# Altium PCB Devre_2_Proje.PcbDoc
Units mm, origin at the board's own origin, x right, y up, seen from the top; angles counter-clockwise.
Board outline 100 x 100 mm, 2 copper layers (Top Layer, Bottom Layer); 11 components, 4 nets, 25 pads, 6 vias.
Unrouted connection lines stored in the file: 7.
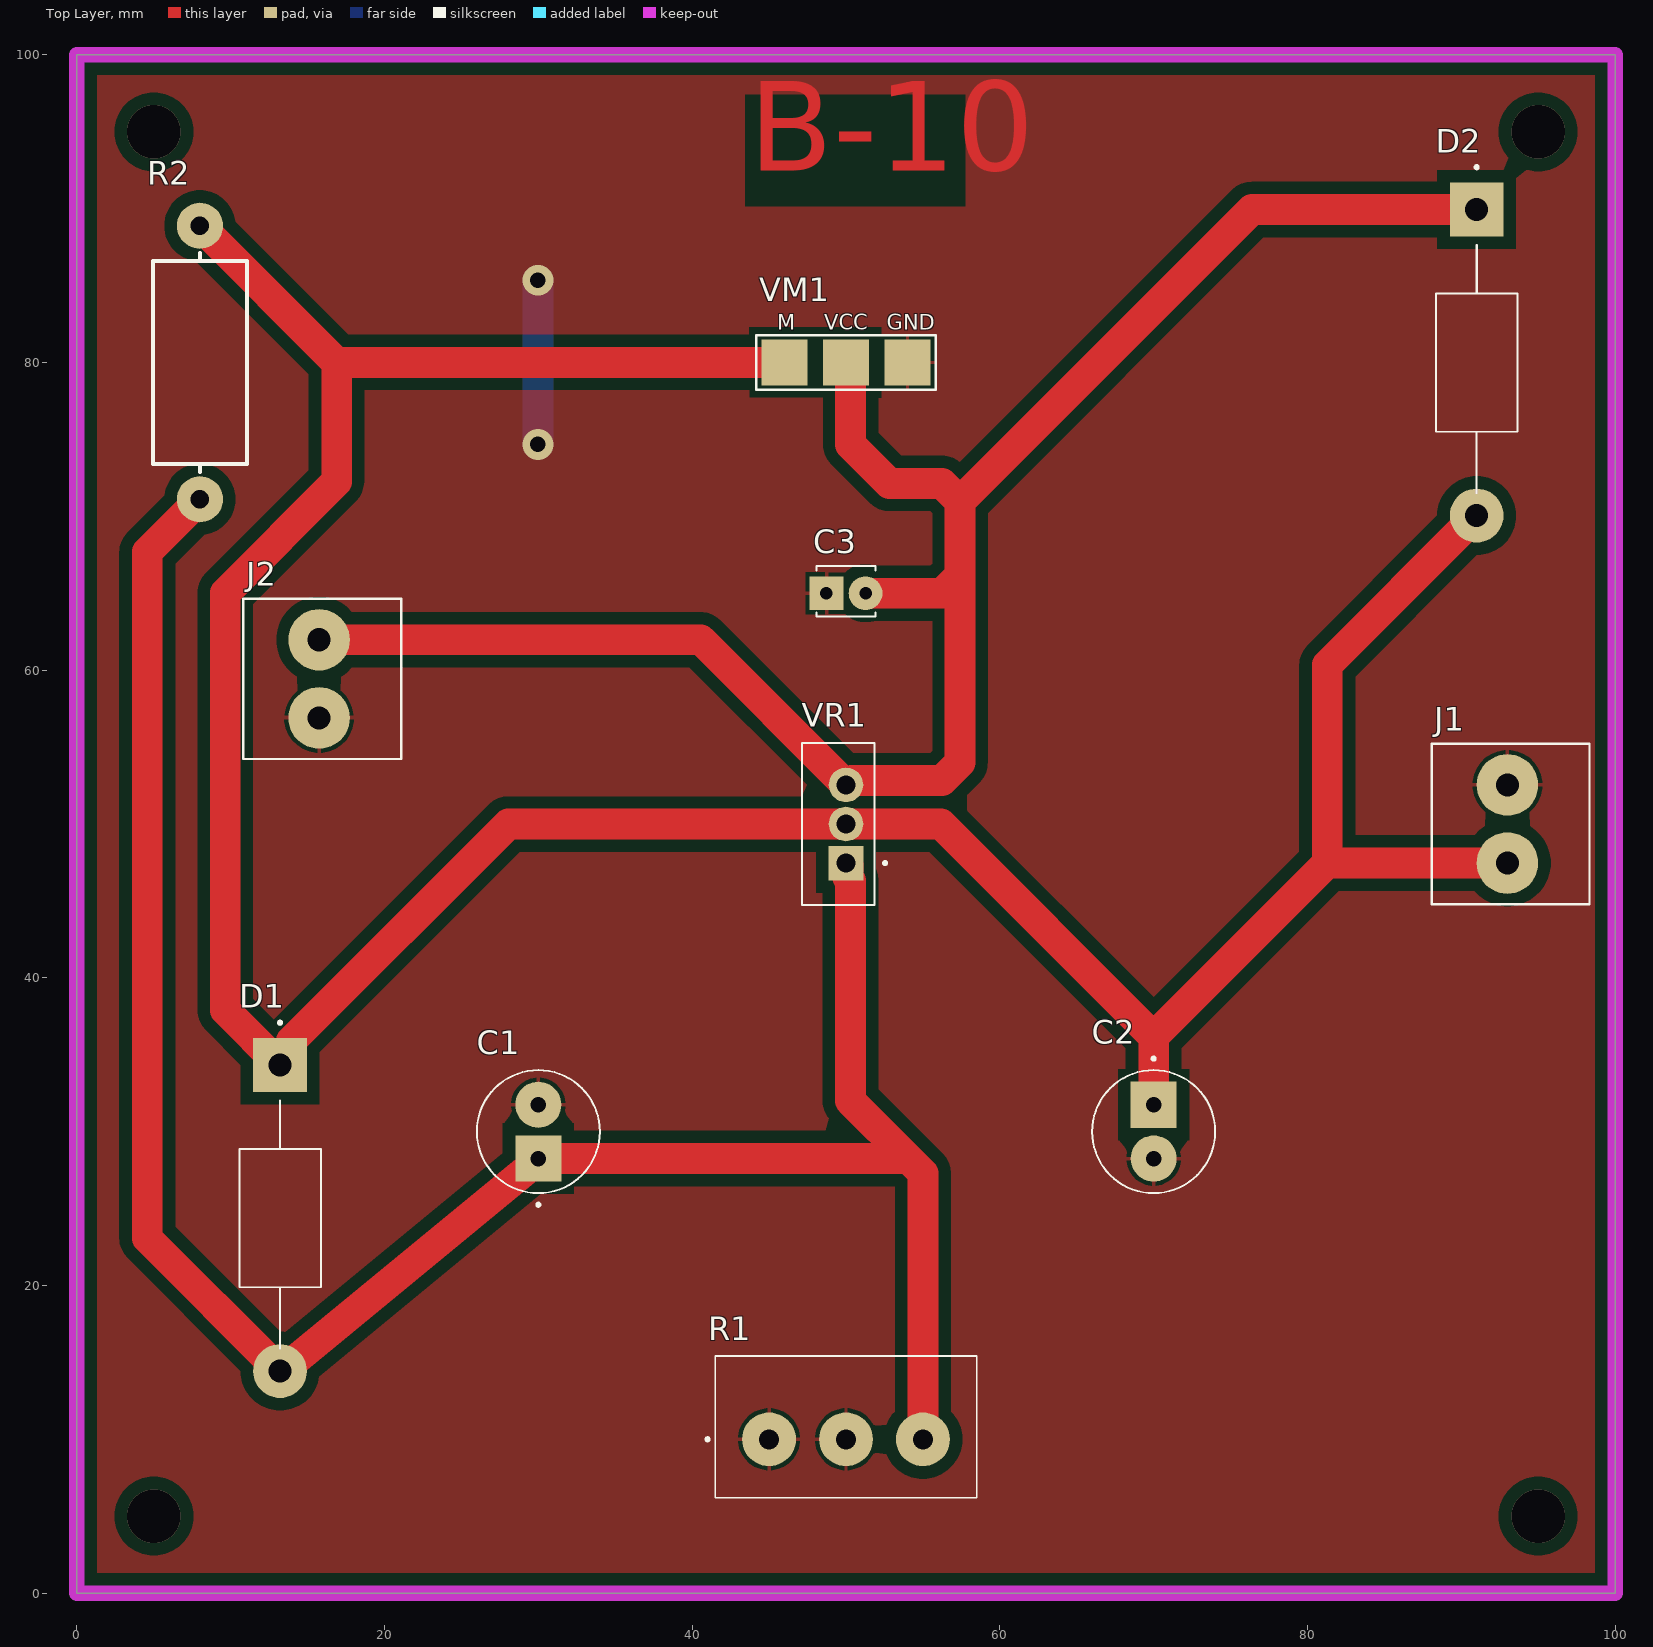
[diagram p0: Top Layer view]
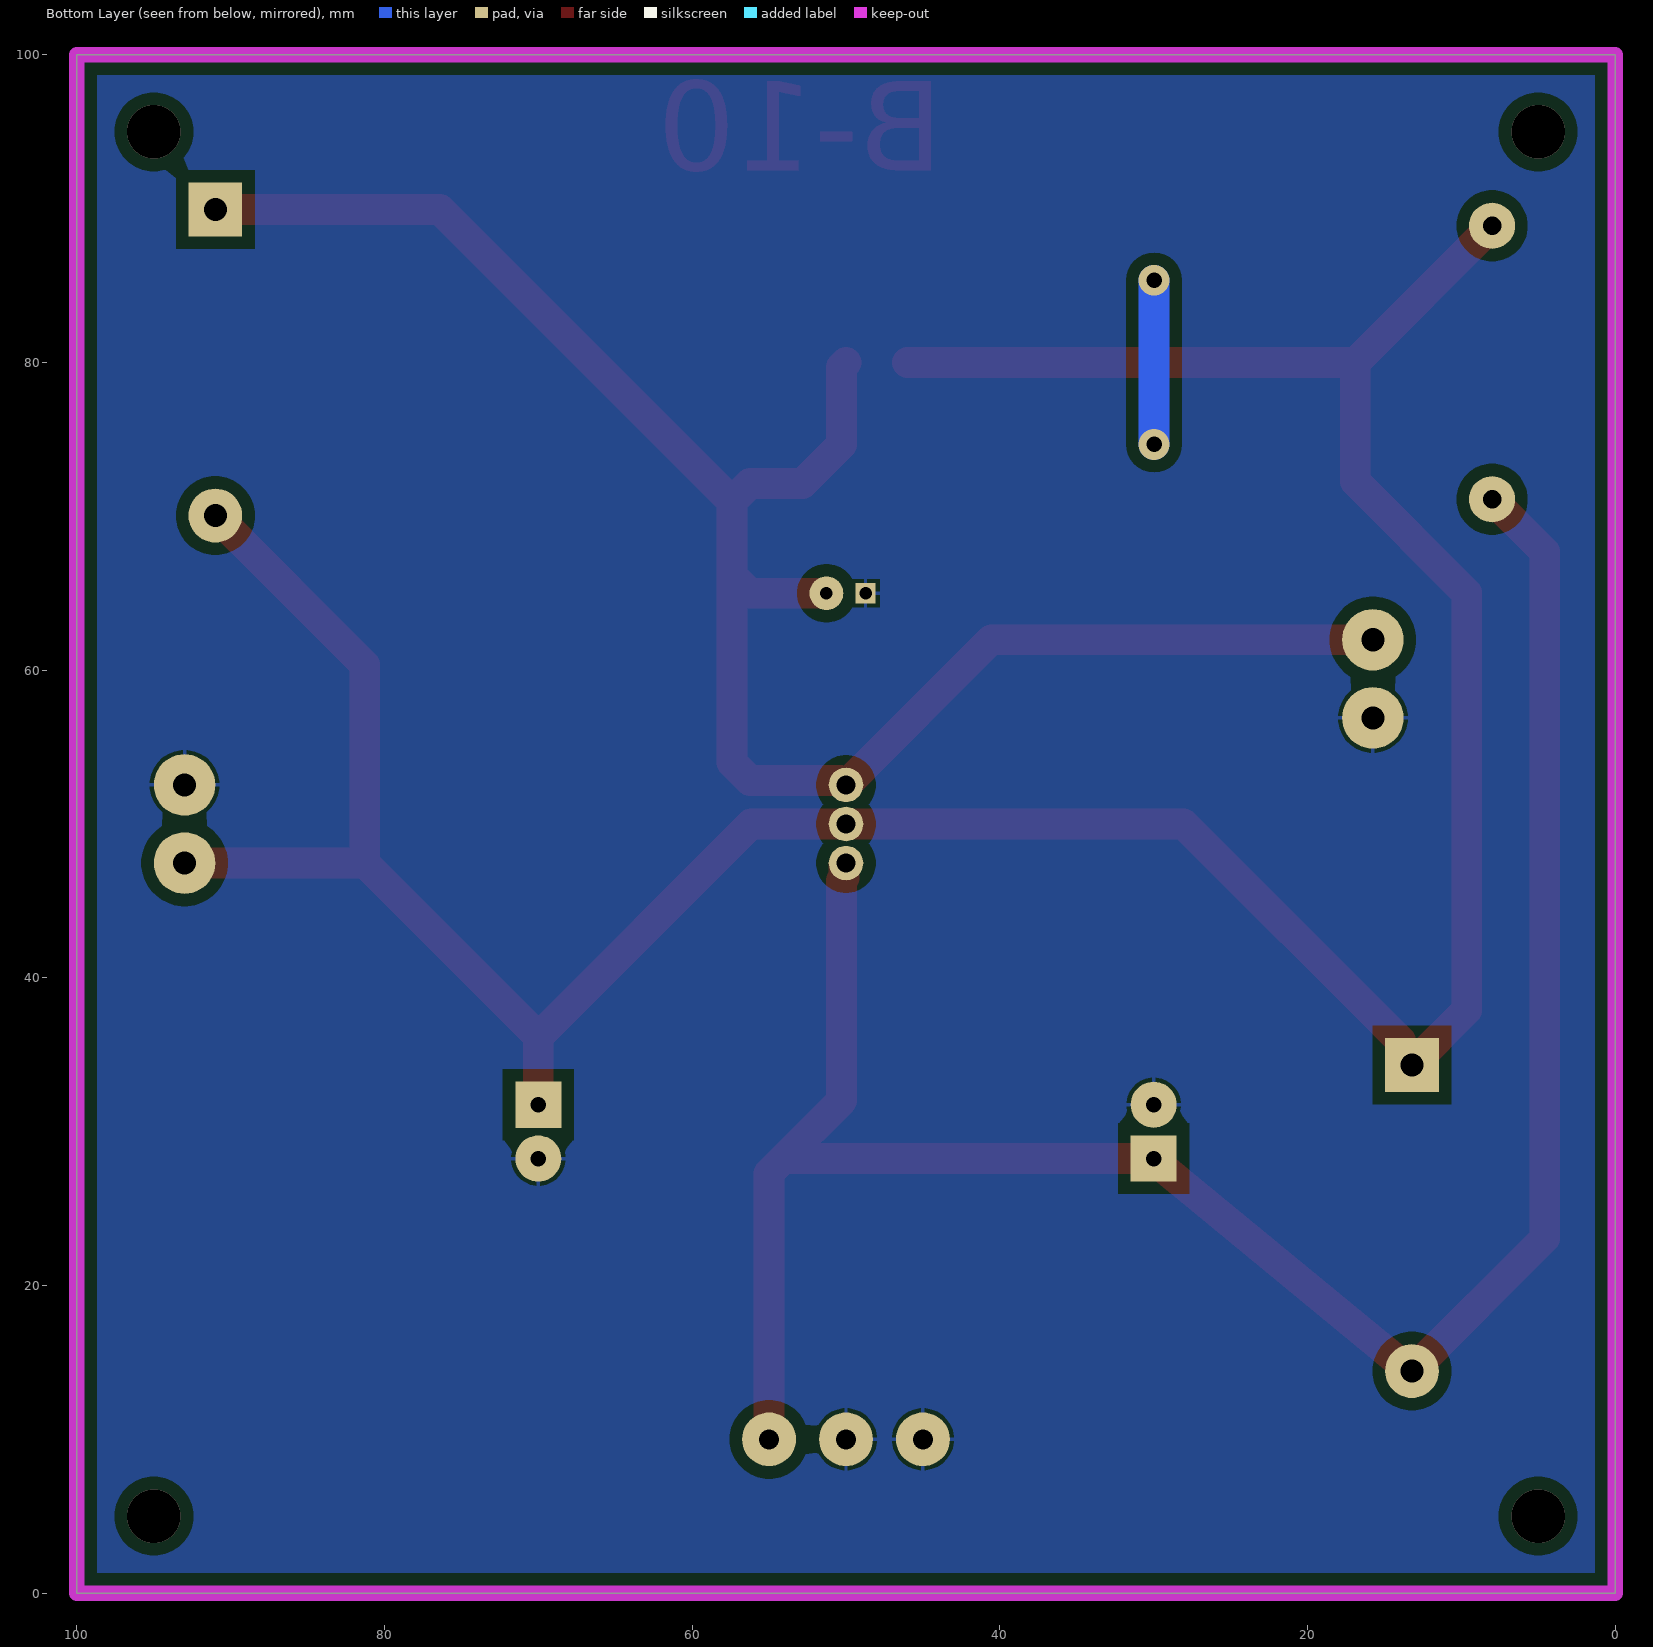
[diagram p1: Bottom Layer view, seen from below]
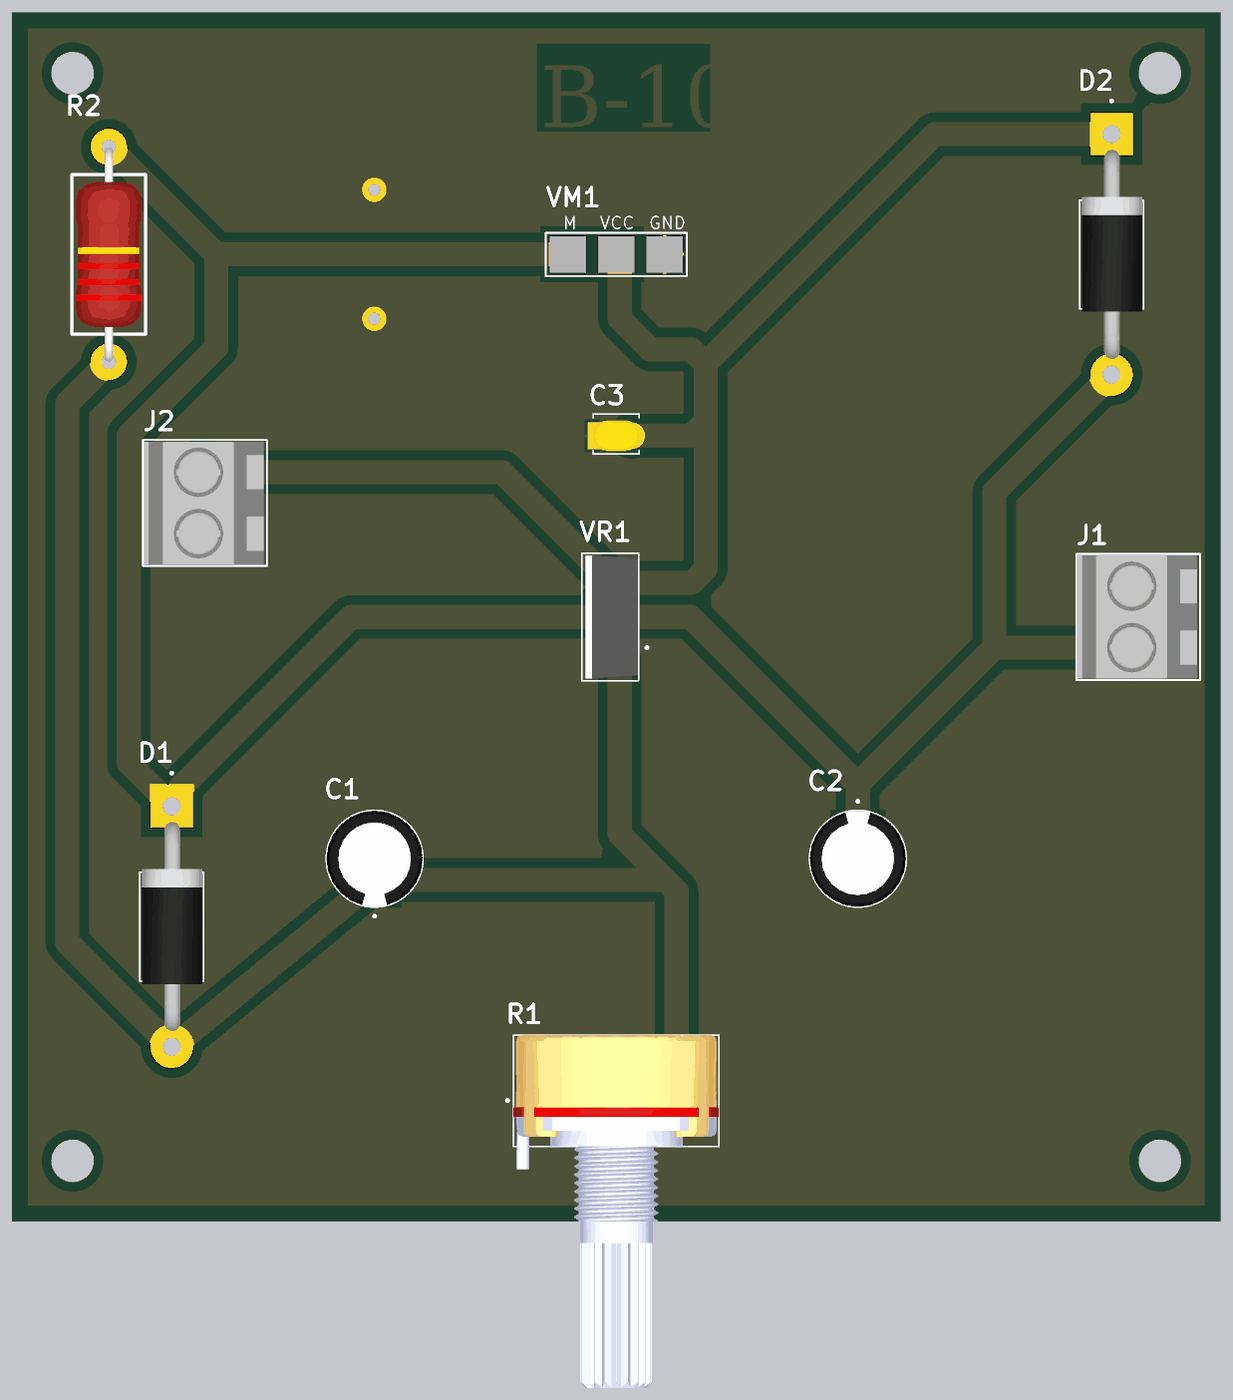
[diagram p2: 3D render of the assembled board from above, using the file's embedded part models]

## Layer stack, top to bottom
Top Solder: solder mask 0.0102, Solder Resist, Dk 3.5
Top Layer: signal copper 0.0356
Dielectric 1: dielectric 0.32, FR-4, Dk 4.8
Bottom Layer: signal copper 0.0356
Bottom Solder: solder mask 0.0102, Solder Resist, Dk 3.5

## Board outline
0,0 0,100 100,100 100,0

## Design rules (kind name [scope] priority, off if disabled: settings)
Clearance [All] p1: gap=0.254 ignorepadtopadclearanceinfootprint=TRUE except(0.8: Arc-Fill Arc-Poly Arc-Region Track-Fill Track-Poly Track-Region SMDPad-Fill SMDPad-Poly SMDPad-Region THPad-Fill THPad-Poly THPad-Region Via-Fill Via-Poly Via-Region Fill-Fill Fill-Poly Fill-Region Poly-Poly Poly-Region Region-Region)
PolygonConnect [All] p1: connectstyle=Relief reliefconductorwidth=0.254 reliefentries=4 polygonreliefangle="90 Angle" airgapwidth=0.254
RoutingVias [All] p1: holewidth=0.711 width=1.27 viastyle="Through Hole" minholewidth=0.711 minwidth=1.27 maxholewidth=0.711 maxwidth=1.27
SolderMaskExpansion [All] p1: expansion=0 istentingtop=FALSE
SupplyNets "Schematic Supply Nets" [InNet('GND')] p1: voltage=0.000
Width [All] p1: maxlimit=2.5 minlimit=0.8 preferedwidth=1.5 minimp=50.000000 maximp=50.000000 favimp=50.000000
30 further rules are at their usual default settings.

## Components (designator, comment, footprint, x,y, rotation, side; value= is the part's Value field where it differs from the comment)
C1 "10uF" CAP-ELEC 30,30 r90 top
C2 "22uF" CAP-ELEC 70,30 r270 top
C3 "100nF" CAP-CER-100nF 50,65 r0 top
D1 "1N5408G" DIODE_1N5408 13.208,24.384 r270 top
D2 "1N5408G" DIODE_1N5408 91,80 r270 top
J1 "TERM BLK 1x2P 5.08mm" Term_Block_5.08mm-1x2P 93,50 r90 top value="Term Block"
J2 "TERM BLK 1x2P 5.08mm" Term_Block_5.08mm-1x2P 15.748,59.436 r90 top value="Term Block"
R1 "POT" POT 50,10 r0 top
R2 "220R" RES-AXIAL-0.7 8,80 r270 top
VM1 "Voltmetre" Voltmetre 50,80 r0 top
VR1 "LM317T" LM317T 50,50 r90 top

## Footprints (in the part's own frame and the unit in brackets; to place one, negate y for a bottom-side part, rotate by r counter-clockwise, add the part's x,y. Pads: shape width x height; smd on the part's side, far side on the other; paste and mask are expansions set on the pad)
CAP-CER-100nF [mm]
  rect 2.2x2.2 / inner round 1.318 / far side rect 1.318x1.318 hole 0.81: 1(-1.27,0)
  round 2.2 hole 0.81: 2(1.27,0)
  silkscreen extent -1.91,-1.52 1.91,1.78, body extent -1.91,-1.27 1.91,1.27, height 4.66
CAP-ELEC [mm]
  rect 3x3 / inner round 3 / far side rect 3x3 hole 1: 1(-1.75,0)
  round 3 hole 1: 2(1.75,0)
  silkscreen extent -4.85,-4 4,4, body extent -4,-3.99 3.99,3.99, height 11.5
DIODE_1N5408 [mm]
  round 3.5 hole 1.5 mask+0.102: A(9.95,0)
  rect 3.5x3.5 / inner round 3.5 / far side rect 3.5x3.5 hole 1.5 mask+0.102: C(-9.95,0)
  silkscreen extent -12.8,-2.65 8.47,2.65, body extent -8.66,-2.46 8.66,2.54, height 6
LM317T [mm]
  rect 2.25x2.25 / inner round 2.25 / far side round 2.25 hole 1.24: 1(-2.54,0)
  round 2.25 hole 1.24: 2(0,0) 3(2.54,0)
  silkscreen extent -5.27,-2.64 5.27,2.86, body extent -5.08,-1.81 5.08,2.54, height 20.4
POT [mm]
  round 3.5 hole 1.3 mask+0.102: 1(-5,0) 2(0,0) 3(5,0)
  silkscreen extent -9.1,-3.8 8.5,5.4, body extent -8.5,-23.8 8.49,5.4, height 21
RES-AXIAL-0.7 [mm]
  round 3 hole 1.2 mask+0.08: 1(-8.89,0) 2(8.89,0)
  silkscreen extent -7.11,-3.05 7.11,3.05, body extent -8.85,-2.75 8.85,2.75, height 5.25
Term_Block_5.08mm-1x2P [mm]
  round 4 hole 1.5: 1(-2.54,0) 2(2.54,0)
  silkscreen extent -5.21,-5.33 5.21,4.93, body extent -5.08,-5.08 5.08,4.83, height 14.48
Voltmetre [mm]
  rect 3x3 smd mask+0.08: 1(-4,0) 2(0,0) 3(4,0)
  silkscreen extent -5.84,-1.78 5.84,1.78

## Part data
C1: library part "CAP ELEC 10uF", "CAP-ELEC 10 uF"
C2: library part "CAP ELEC 22uF", "CAP-ELEC 22 uF"
C3: library part "CAP CER", "0.1uF (100nF)"
D1 D2: "3A, 1000V, Standard Rectifier", Package="DO-201AD Taiwan Semiconductor", Check_prices=https://www.snapeda.com/parts/1N5408G/taiwan/view-part/?ref=eda, MF="Taiwan Semiconductor", MP=1N5408G, SnapEDA_Link=https://www.snapeda.com/parts/1N5408G/taiwan/view-part/?ref=snap
J1 J2: "17.5A 1x2P 2P 400V 5.08mm Board Side/Plug Green 2 1 Through Hole,P=5.08mm Headers, Plugs and Sockets RoHS", Current Rating=17.5A, Package="Through Hole,P=5.08mm", Voltage Rating (Max)=400V, MF="Phoenix Contact", MP="MKDS 1,5/ 2-5,08"
R1: "16mm Rotary Potentiometers", Package=Package, Check_prices=https://www.snapeda.com/parts/WH148-1A-2-18T-L20/Kls+electronics/view-part/?ref=eda, MF="Kls electronics", MP=WH148-1A-2-18T-L20, SnapEDA_Link=https://www.snapeda.com/parts/WH148-1A-2-18T-L20/Kls+electronics/view-part/?ref=snap
R2: library part "RES 220R", "RES 220R 2W / AXIAL-0.7"
VM1: "Voltmetre 3 kablolu 0-100V"
VR1: "Linear Voltage Regulator IC Positive Adjustable 1 Output 1.5A TO-220AB", Package="TO-220-3 ON", Check_prices=https://www.snapeda.com/parts/LM317T/Onsemi/view-part/?ref=eda, MF=onsemi, MP=LM317T, SnapEDA_Link=https://www.snapeda.com/parts/LM317T/Onsemi/view-part/?ref=snap

## Via types
v1: diameter 3.5, hole 3.5, Top Layer to Bottom Layer, 4 vias
v2: diameter 2, hole 1, Top Layer to Bottom Layer, 2 vias

## Nets (pads, with @x,y where several pads share a name; then routed paths per layer and width w, separated by ;. In a path a pad name is that pad's centre, name@x,y a point inside that pad or via, vN(x,y) a via of type N, cw(c..) or ccw(c..) an arc to the next point about the centre after c; other vN are vias at no path point)
GND: C1.2 C2.2 C3.1 J1.2 J2.1 R1.1 R1.2 VM1.3 | length 10.7
  Bottom Layer w2: v2(29.972,74.676) v2(29.972,85.344)
NetC1_1: C1.1 D1.A R1.3 R2.2 VR1.1 | length 147
  Top Layer w2: R2.2 4.572,67.682 4.572,23.07 D1.A ; D1.A@13.261,14.381 29.5,27.75 C1.1 54.046,28.25 ; VR1.1 50.125,47.335 50.125,46.499 50.292,46.332 50.292,32.004 54.046,28.25 ; R1.3 55,27.296 54.046,28.25
NetC2_1: C2.1 D1.C D2.A J1.1 R2.1 VM1.1 VR1.2 | length 220
  Top Layer w2: R2.1 16.89,80 ; VM1.1 16.89,80 ; C2.1 70,36.172 ; D2.A 81.288,60.338 81.288,47.46 ; J1.1 81.288,47.46 ; 16.89,80 16.89,72.262 9.652,65.024 9.652,37.89 D1.C 13.958,35.084 13.958,35.908 28.05,50 VR1.2 56.172,50 70,36.172 ; 70,36.172 81.288,47.46
NetC3_2: C3.2 D2.C J2.2 VM1.2 VR1.3 | length 125.3
  Top Layer w2: J2.2 40.564,61.976 VR1.3 50.068,52.54 50.36,52.832 56.232,52.832 57.404,54.004 57.404,66.172 ; VM1.2 50.292,79.708 50.292,74.676 52.832,72.136 56.232,72.136 57.404,70.964 ; C3.2 56.232,65 57.404,66.172 ; D2.C 76.39,89.95 57.404,70.964 ; 57.404,66.172 57.404,70.964
copper on no net:
  other v1: 5,5 95,5 5,95 95,95

## Polygon pours and split planes (outlines as drawn)
GND on Top Layer "GND_L01_P004" (solid, pour order 4): 0,100.076 100.076,100.076 100.076,0 0,0
GND on Bottom Layer "GND_L02_P003" (solid, pour order 3): 0,0 0,100.076 100.076,100.076 100.076,0

## Keep-outs
Keep-Out Layer:
  the board outline again, w1

## Other copper
Top Layer:
  text "B-10" at 43.688,90.544 h10

## Text inside footprints (layer, text, board x,y; h text height)
VM1: Top Overlay "M" at 45.528,82.132 h1; Top Overlay "VCC" at 48.576,82.132 h1; Top Overlay "GND" at 52.64,82.132 h1